# Altium PCB PCB1.pcbdoc (part 1 of 2)
Units mil, origin at the board's own origin, x right, y up, seen from the top; angles counter-clockwise.
Board outline 3910 x 3132 mil, 4 copper layers (Top Layer, Inner1, Inner2, Bottom Layer); 109 components, 89 nets, 472 pads, 360 vias.
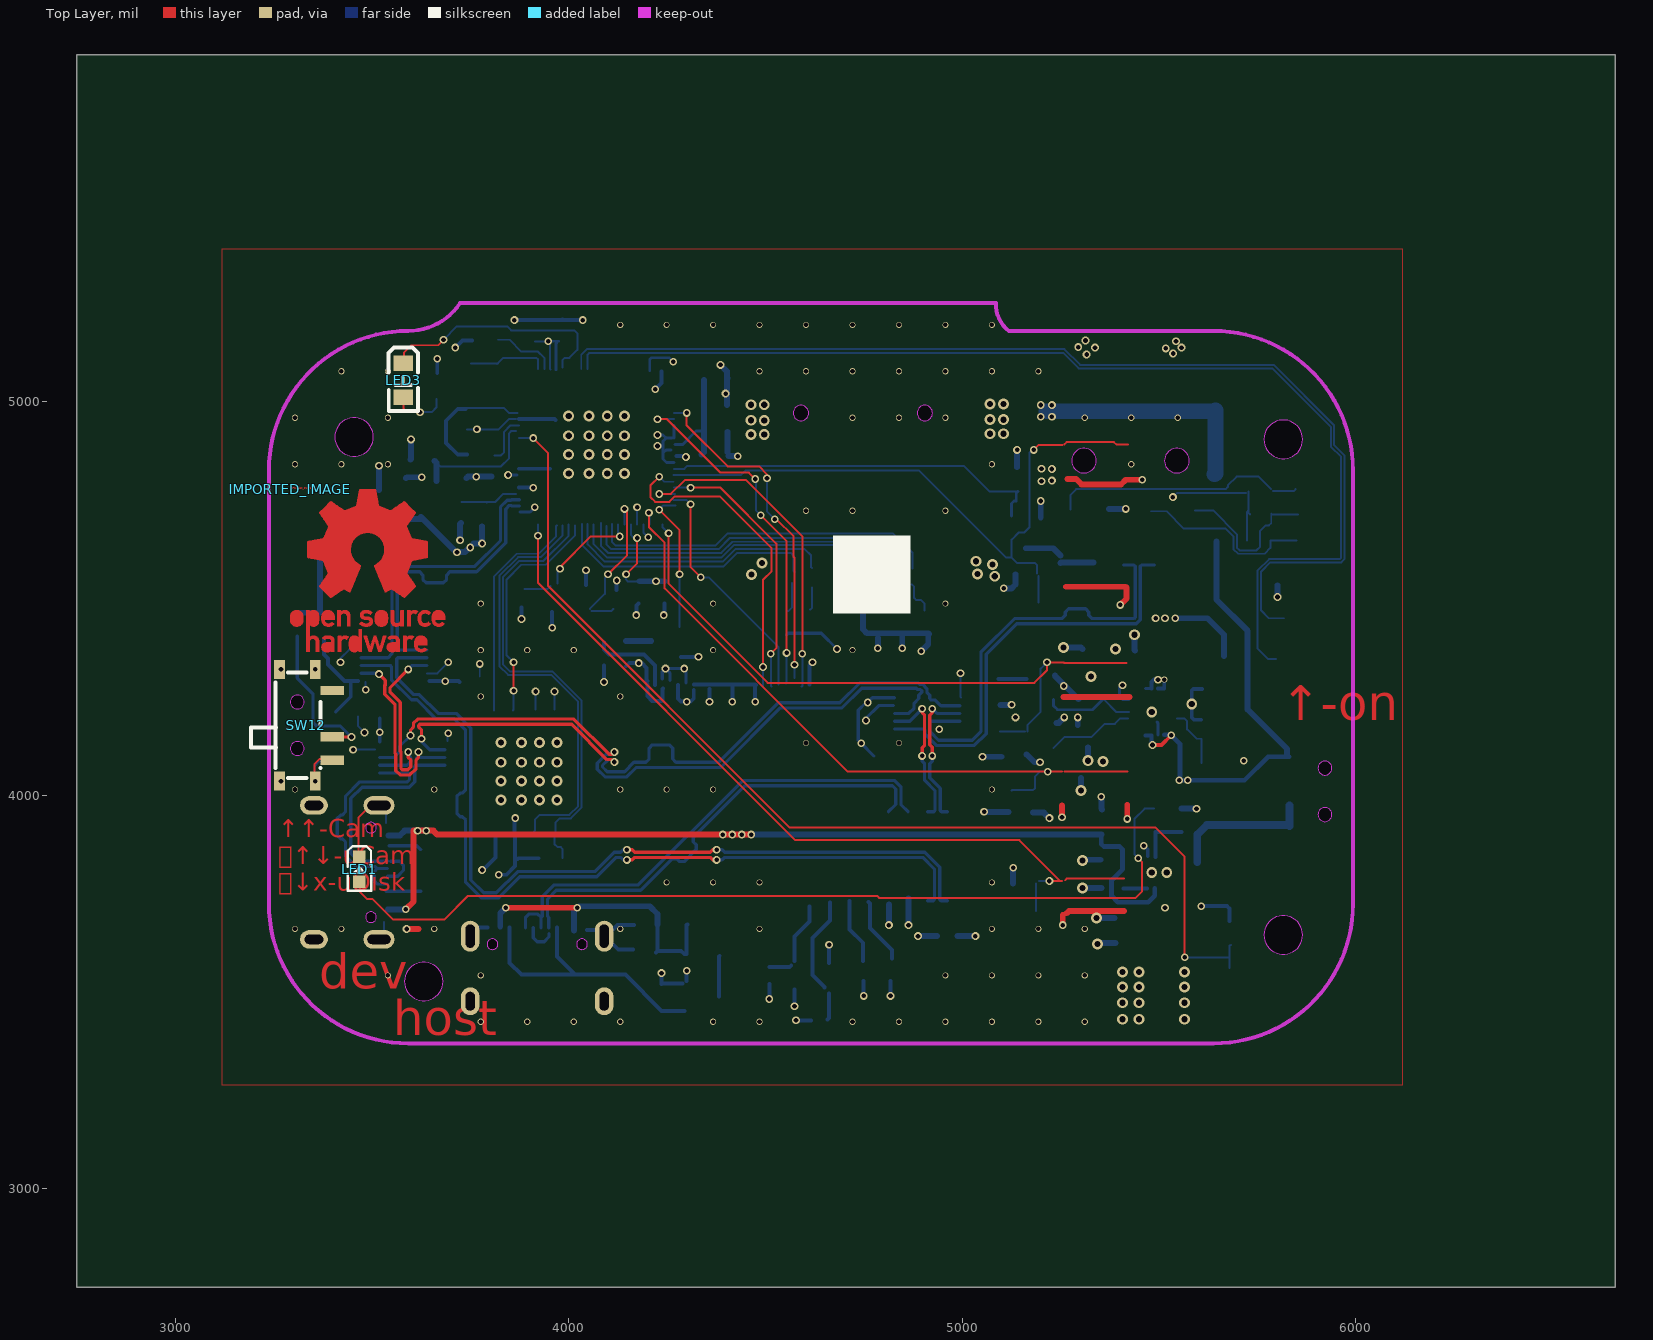
[diagram p0: Top Layer view]
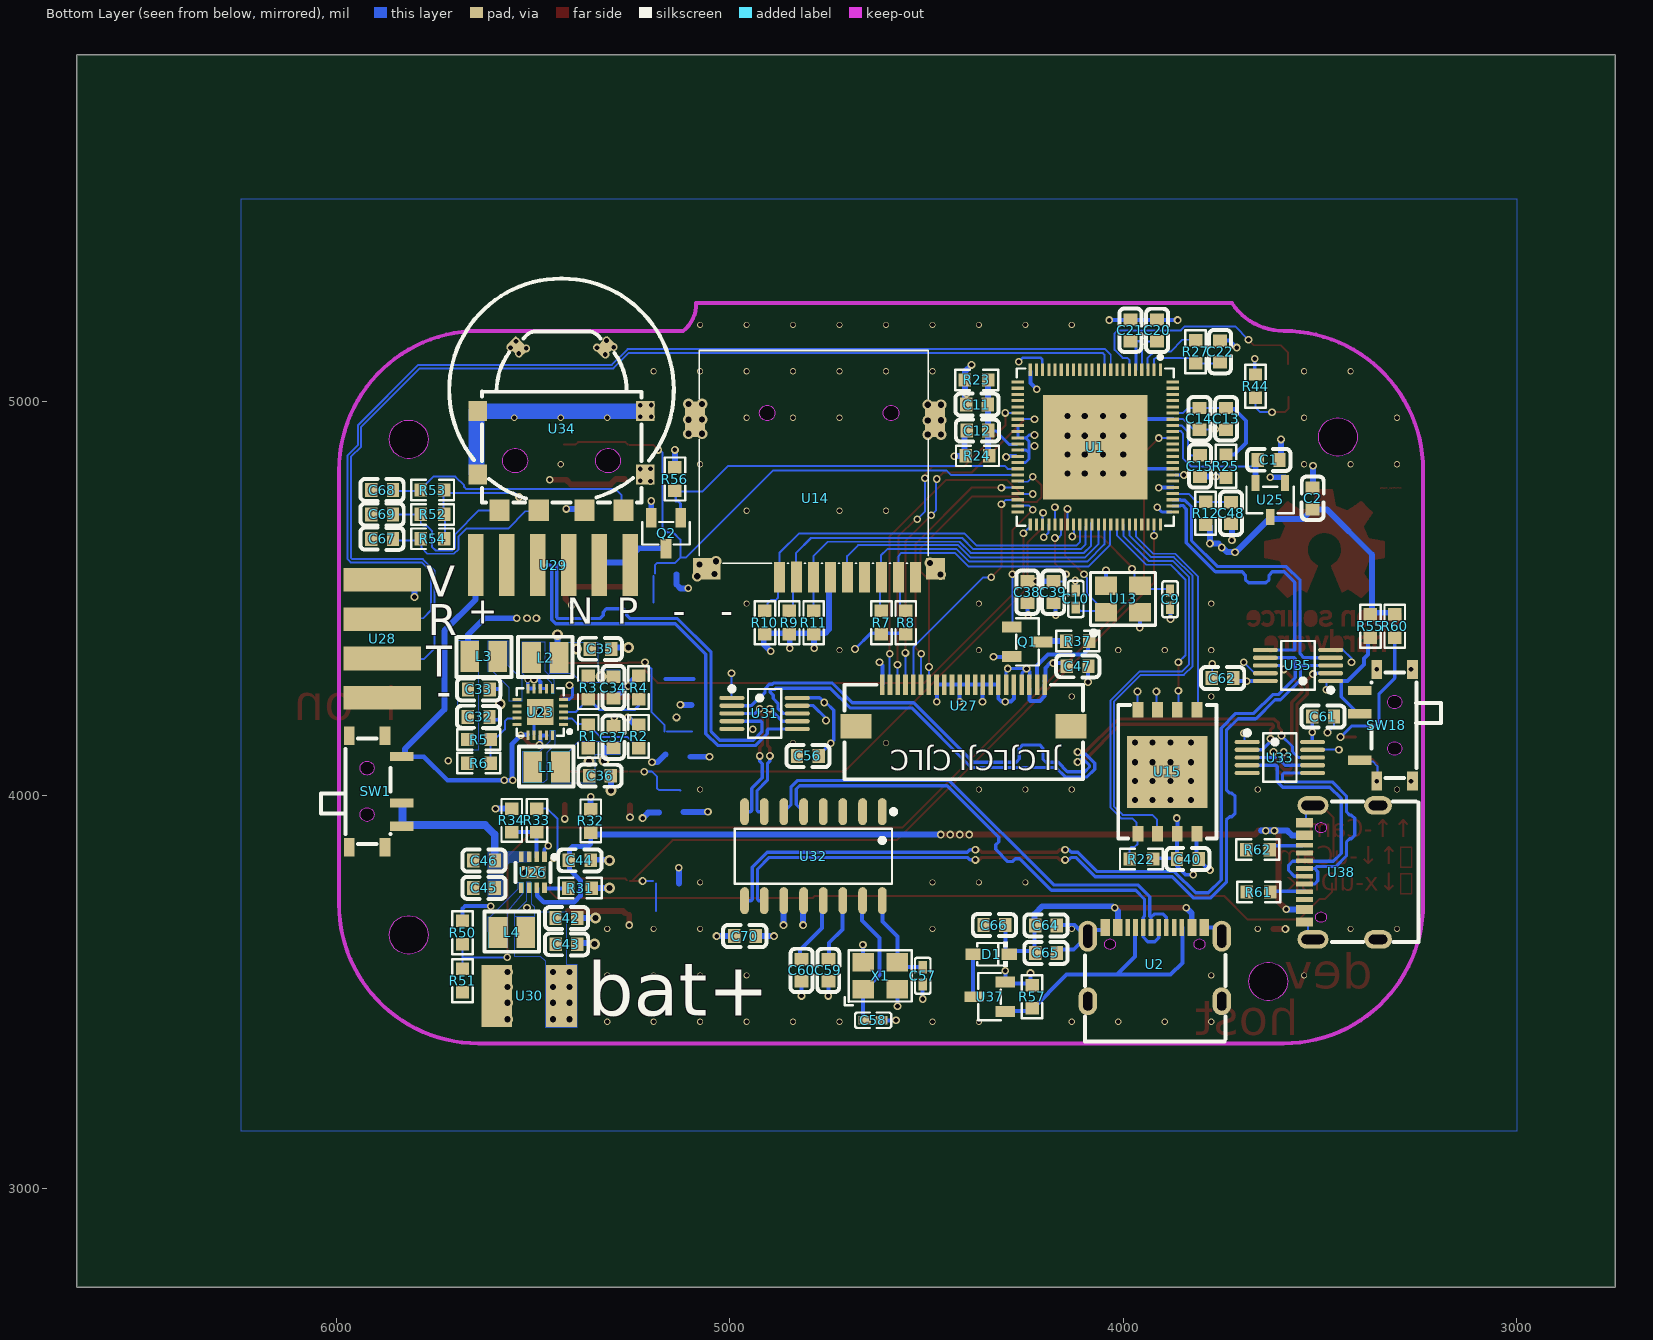
[diagram p1: Bottom Layer view, seen from below]
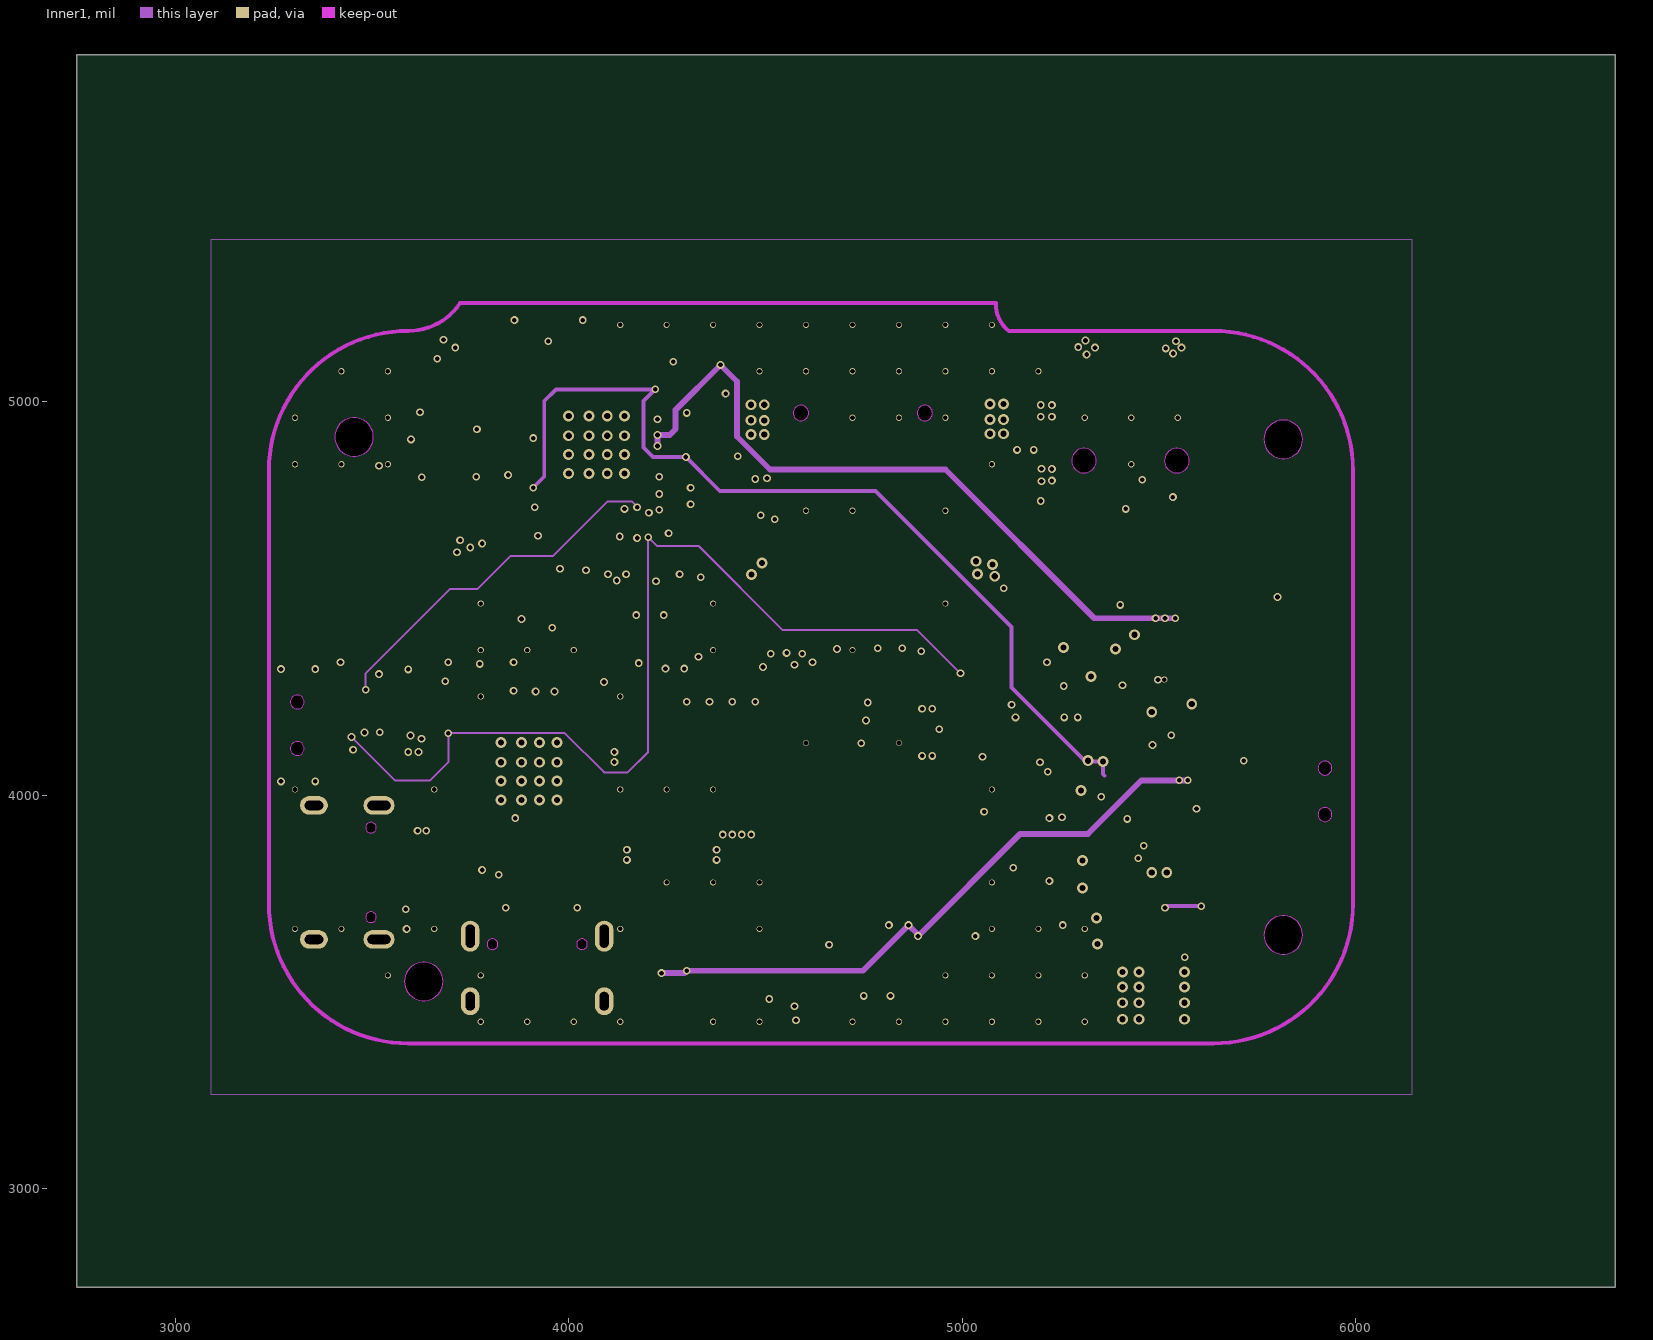
[diagram p2: Inner1]
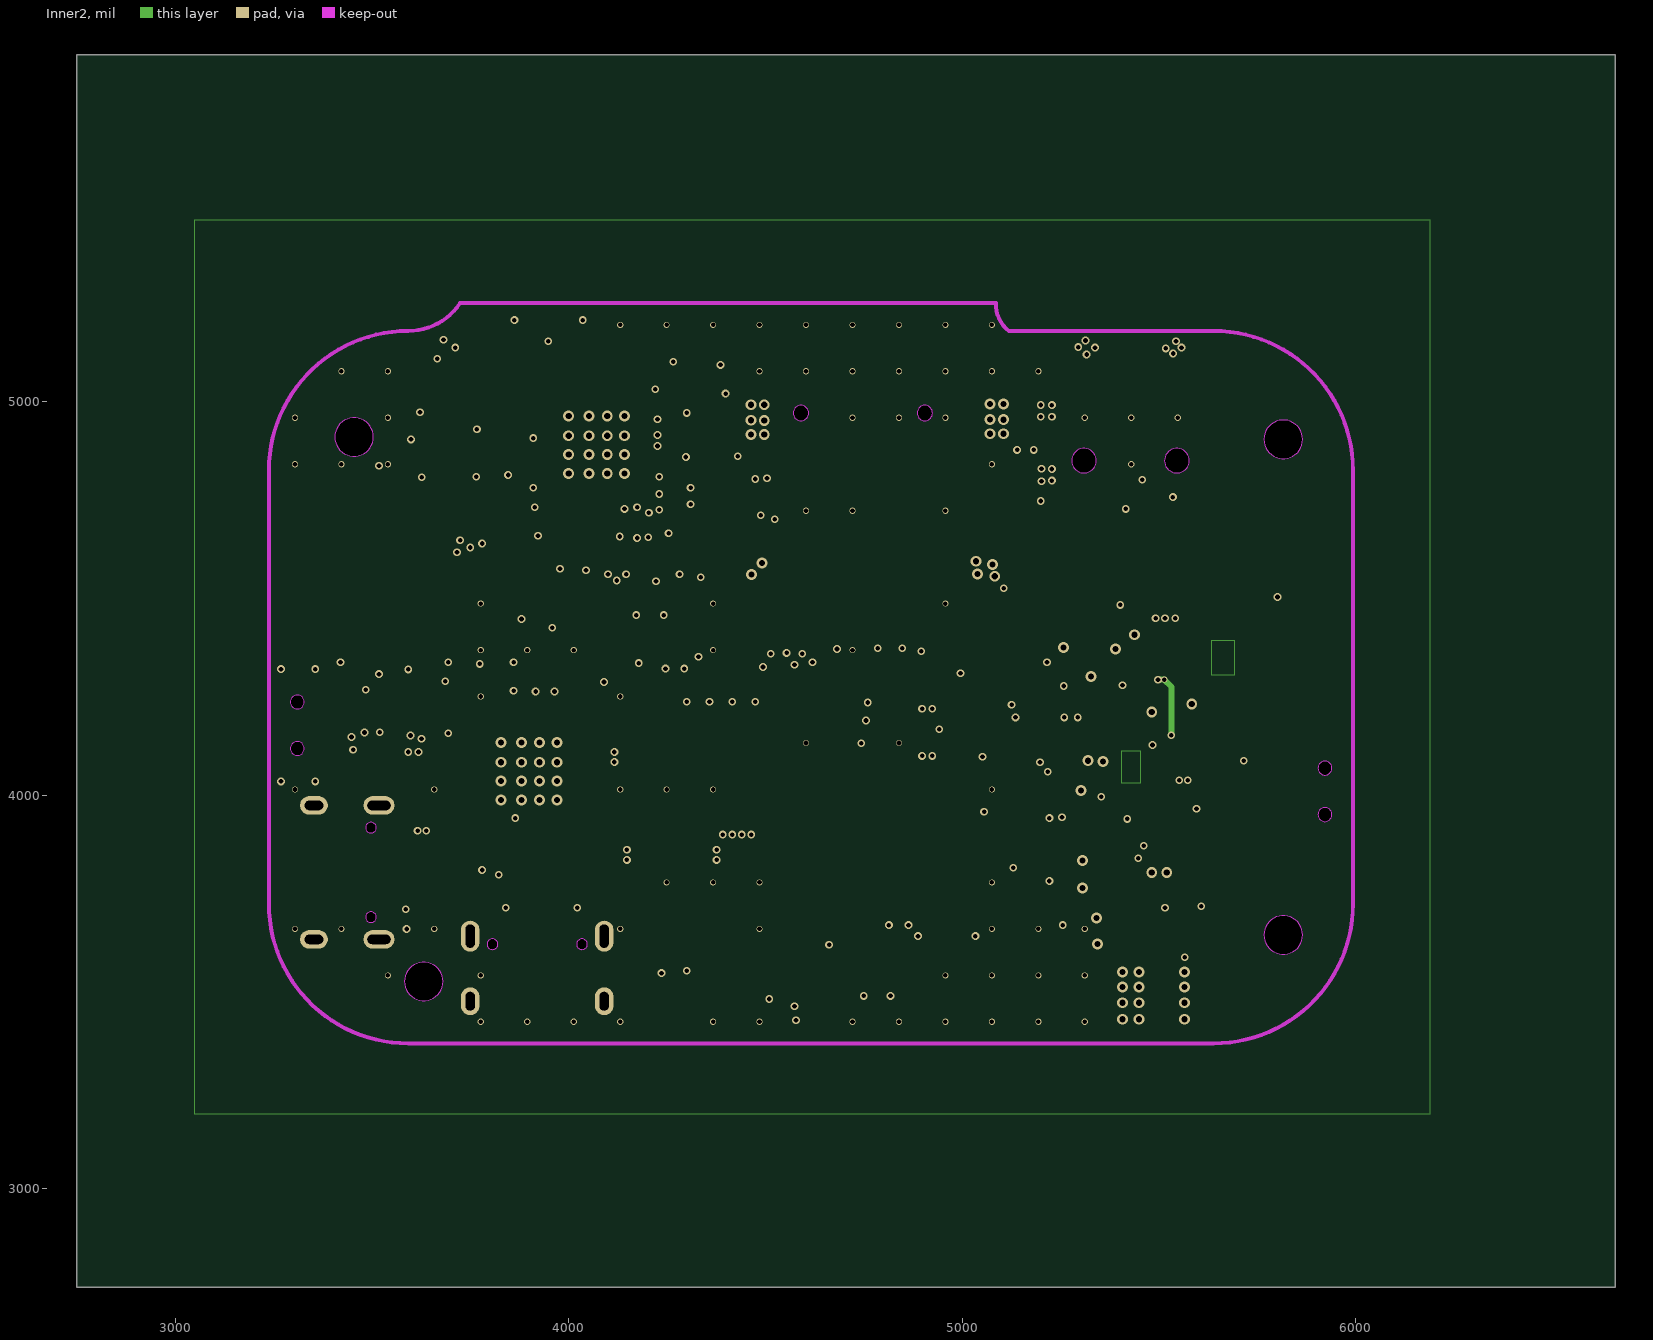
[diagram p3: Inner2]

## Layer stack, top to bottom
Top Layer: signal copper (thickness not stored)
Dielectric: dielectric 12.6, FR-4, Dk 4.8
Inner1: signal copper (thickness not stored)
Dielectric: dielectric 12.6, FR-4, Dk 4.8
Inner2: signal copper (thickness not stored)
Dielectric: dielectric 12.6, FR-4, Dk 4.8
Bottom Layer: signal copper (thickness not stored)

## Board outline
6660,2750 2750,2750 2750,5882 6660,5882
cut-out: 3503.69,4910.79 ccw(c3454.47,4910.62) 3405.26,4910.79 ccw(c3454.47,4910.96)
cut-out: 5865.88,4904.79 ccw(c5816.66,4904.79) 5767.45,4904.79 ccw(c5816.66,4904.79)
cut-out: 3680.84,3526.84 ccw(c3631.63,3526.54) 3582.42,3526.84 ccw(c3631.63,3527.14)
cut-out: 5865.88,3644.95 ccw(c5816.66,3644.95) 5767.45,3644.95 ccw(c5816.66,3644.95)

## Components (designator, comment, footprint, x,y, rotation, side; value= is the part's Value field where it differs from the comment)
C1 "CL10A105KB8NNNC" C0603 3630.66,4852.85 r0 bottom
C2 "CL10A105KB8NNNC" C0603 3518.66,4754.85 r270 bottom
C9 "0402CG180J500NT" C0402 3881.26,4498.43 r270 bottom
C10 "0402CG180J500NT" C0402 4120.72,4498.97 r270 bottom
C11 "0603B104K500NT" C0603 4372.12,4993.13 r0 bottom
C12 "0603B104K500NT" C0603 4370.72,4926.97 r180 bottom
C13 "CL10A106MA8NRNC" C0603 3738.72,4956.97 r270 bottom
C14 "0603B104K500NT" C0603 3806.72,4956.97 r270 bottom
C15 "CL10A105KB8NNNC" C0603 3805.16,4836.64 r270 bottom
C20 "CL10A106MA8NRNC" C0603 3914,5182 r90 bottom
C21 "0603B104K500NT" C0603 3982,5182 r270 bottom
C22 "CL10A105KB8NNNC" C0603 3754,5128 r90 bottom
C32 "CL10A106MA8NRNC" C0603 5638.89,4199.35 r180 bottom
C33 "0603B104K500NT" C0603 5638.45,4268.91 r180 bottom
C34 "CL10A106MA8NRNC" C0603 5296.3,4273.71 r270 bottom
C35 "0603B104K500NT" C0603 5329.1,4372.3 r180 bottom
C36 "CL10A106MA8NRNC" C0603 5330.3,4049.71 r180 bottom
C37 "0603B104K500NT" C0603 5296.3,4147.71 r90 bottom
C38 "CL10A225KO8NNNC" C0603 4243.92,4516.38 r90 bottom
C39 "0603B104K500NT" C0603 4177.92,4516.38 r90 bottom
C40 "CL10A225KO8NNNC" C0603 3836,3837.95 r180 bottom
C42 "CL10A106MA8NRNC" C0603 5415.87,3687.9 r0 bottom
C43 "CL10A106MA8NRNC" C0603 5415.53,3621.3 r0 bottom
C44 "CL10A106MA8NRNC" C0603 5381.8,3834.81 r0 bottom
C45 "CL10A106MA8NRNC" C0603 5624.99,3764.61 r180 bottom
C46 "CL10A106MA8NRNC" C0603 5624.8,3834.01 r180 bottom
C47 "CL10A106MA8NRNC" C0603 4116,4328 r0 bottom
C48 "CL10A106MA8NRNC" C0603 3726.02,4717.36 r90 bottom
C56 "0603B104K500NT" C0603 4802,4100 r0 bottom
C57 "0402CG180J500NT" C0402 4509.89,3541.16 r90 bottom
C58 "0402CG180J500NT" C0402 4636.11,3428.11 r0 bottom
C59 "CL10A106MA8NRNC" C0603 4749.89,3555.16 r90 bottom
C60 "CL10A106MA8NRNC" C0603 4817.89,3555.16 r90 bottom
C61 "0603B104K500NT" C0603 3492,4200 r180 bottom
C62 "0603B104K500NT" C0603 3748,4298 r0 bottom
C64 "CL10A106MA8NRNC" C0603 4196.59,3669.2 r180 bottom
C65 "CL10A106MA8NRNC" C0603 4196.59,3599.2 r180 bottom
C66 "CL10A106MA8NRNC" C0603 4328,3670 r0 bottom
C67 "0603B104K500NT" C0603 5884,4652 r180 bottom
C68 "0603B104K500NT" C0603 5884,4776 r180 bottom
C69 "0603B104K500NT" C0603 5884,4714 r180 bottom
C70 "0603B104K500NT" C0603 4962,3642 r180 bottom
D1 "1N5819WS_C191023" SOD-323_L1.8-W1.3-LS2.5-RD 4336,3596 r0 bottom
IMPORTED_IMAGE "IMPORTED_IMAGE" IMPORTED_IMAGE 3292,4778 r0 top
L1 "CMLW252012S2R2MST" IND-SMD_L2.5-W2.0_SWPA2520 5466.3,4071.71 r180 bottom
L2 "CMLW252012S2R2MST" IND-SMD_L2.5-W2.0_SWPA2520 5469.12,4350.17 r180 bottom
L3 "CMLW252012S2R2MST" IND-SMD_L2.5-W2.0_SWPA2520 5625.88,4353.24 r0 bottom
L4 "CMLW252012S2R2MST" IND-SMD_L2.5-W2.0_SWPA2520 5554.24,3651.45 r180 bottom
LED1 "XL-1608SURC-06" LED0603-RD_RED 3468,3812 r270 top
LED3 "XL-2012UGC" LED0805-RD_GREEN 3579.61,5055.27 r270 top
Q1 "SI2302" SOT-23-3_L2.9-W1.3-P1.90-LS2.4-BR 4244,4390 r0 bottom
Q2 "SI2302" SOT-23-3_L2.9-W1.3-P1.90-LS2.4-BR 5162.48,4666.14 r90 bottom
R1 "RC0603FR-07100KL" R0603 5360.3,4149.71 r270 bottom
R2 "RC0603FR-07100KL" R0603 5232.3,4149.71 r270 bottom
R3 "0603WAF4702T5E" R0603 5360.3,4273.71 r90 bottom
R4 "0603WAF1002T5E" R0603 5232.3,4273.71 r270 bottom
R5 "0603WAF1502T5E" R0603 5638.3,4141.71 r0 bottom
R6 "0603WAF4701T5E" R0603 5638.3,4081.71 r180 bottom
R7 "0603WAF1002T5E" R0603 4615.13,4438.87 r270 bottom
R8 "0603WAF1002T5E" R0603 4553.13,4438.87 r270 bottom
R9 "0603WAF1002T5E" R0603 4849.13,4438.87 r270 bottom
R10 "0603WAF1002T5E" R0603 4911.13,4438.87 r270 bottom
R11 "0603WAF1002T5E" R0603 4787.13,4438.87 r270 bottom
R12 "0603WAF1002T5E" R0603 3790.72,4716.97 r270 bottom
R22 "0603WAF1002T5E" R0603 3954,3837.95 r180 bottom
R23 "0603WAF2001T5E" R0603 4372.9,5055.74 r180 bottom
R24 "0603WAF2001T5E" R0603 4370.72,4862.97 r0 bottom
R25 "0603WAF1002T5E" R0603 3739.16,4836.64 r90 bottom
R27 "0603WAF220JT5E" R0603 3816.38,5127.31 r270 bottom
R31 "0603WAF1001T5E" R0603 5380.8,3764.01 r180 bottom
R32 "0603WAF1001T5E" R0603 5353.8,3934.81 r270 bottom
R33 "0603WAF3001T5E" R0603 5490.8,3936.01 r90 bottom
R34 "0603WAF1002T5E" R0603 5554.8,3936.01 r270 bottom
R37 "0603WAF100JT5E" R0603 4116,4392 r180 bottom
R44 "0603WAF3001T5E" R0603 3664,5040 r90 bottom
R50 "0603WAF1002T5E" R0603 5679.8,3650.81 r90 bottom
R51 "0603WAF1002T5E" R0603 5679.8,3528.81 r90 bottom
R52 "0603WAF1002T5E" R0603 5756,4714 r180 bottom
R53 "0603WAF1002T5E" R0603 5756,4776 r180 bottom
R54 "0603WAF1002T5E" R0603 5756,4652 r180 bottom
R55 "0603WAF1002T5E" R0603 3372,4430 r270 bottom
R56 "0603WAF2001T5E" R0603 5140,4804 r90 bottom
R57 "0603WAF1002T5E" R0603 4232,3488 r270 bottom
R60 "0603WAF1002T5E" R0603 3310,4430 r270 bottom
R61 "0603WAF5101T5E" R0603 3656,3754 r180 bottom
R62 "0603WAF5101T5E" R0603 3658,3862 r180 bottom
SW1 "MSK12C02" SW-TH_MSK12C02 5900.77,4009.95 r270 bottom
SW12 "MSK12C02" SW-TH_MSK12C02 3332,4178 r270 top
SW18 "MSK12C02" SW-TH_MSK12C02 3332,4178 r90 bottom
U1 "F1C200S" QFN-88_L10.0-W10.0-P0.40-BL-EP6.75 4071.32,4885.09 r0 bottom
U2 "TypeC-16PIN" USB-C-SMD_TYPE-C-6PIN-2MD-073#1 3920,3570 r180 bottom
U13 "24m" CRYSTAL-SMD_4P-L3.2-W2.5-BL_SIT8008BI 4000.72,4498.97 r180 bottom
U14 "TF-015-N" TF-SMD_TF-015 4783.13,4754.87 r0 bottom
U15 "W25Q256JWEIQ_C2940048" WSON-8_L8.0-W6.0-P1.27-TL-EP 3888,4059.77 r90 bottom
U23 "EA3036" QFN-20_L3.0-W3.0-P0.40-TL-EP1.7 5482.3,4211.71 r0 bottom
U25 "XC6206P302MR_C347375" SOT-23-3_L3.0-W1.7-P0.95-LS2.9-BR 3626.66,4750.85 r90 bottom
U26 "LGS5500DA" DFN-8_L2.0-W2.0-P0.50-TL-EP 5500.8,3804.01 r270 bottom
U27 "2.0寸ips" 2.0寸ips 3724,3366 r0 top
U28 "UART2.54" uart2.54 5883.59,4247.59 r90 bottom
U29 "ir" ir 5252.92,4585.38 r0 bottom
U30 "bat" bat 5592.8,3490.01 r180 bottom
U31 "MSUSB30" MSOP-10_L3.0-W3.0-P0.50-LS5.0-BL 4912,4208 r270 bottom
U32 "SL2.1A" SOP-16_L10.0-W3.9-P1.27-LS6.0-BL 4787.89,3845.16 r0 bottom
U33 "MSUSB30" MSOP-10_L3.0-W3.0-P0.50-LS5.0-BL 3602,4096 r270 bottom
U34 "SIQ-02FVS3" SW-SMD_SIQ-02FVS3_1 5428,4932 r180 bottom
U35 "MSUSB30" MSOP-10_L3.0-W3.0-P0.50-LS5.0-BL 3556,4330 r90 bottom
U37 "SI2301-ZE" SOT-23-3_L2.9-W1.3-P1.90-LS2.4-BR 4340,3488 r180 bottom
U38 "TypeC-16PIN" USB-C-SMD_TYPE-C-6PIN-2MD-073#2 3446,3804 r90 bottom
X1 "X322512MSB4SI" OSC-SMD_4P-L3.2-W2.5-BL 4617.89,3541.16 r180 bottom

## Footprints (in the part's own frame and the unit in brackets; to place one, negate y for a bottom-side part, rotate by r counter-clockwise, add the part's x,y. Pads: shape width x height; smd on the part's side, far side on the other; paste and mask are expansions set on the pad)
2.0寸ips [mm]
  rect 0.3x1.3 smd far side: 1(12.076,23.238) 2(12.576,23.238) 3(13.076,23.238) 4(13.576,23.238) 5(14.076,23.238) 6(14.576,23.238) 7(15.076,23.238) 8(15.576,23.238) 9(16.078,23.239) 10(16.576,23.238) 11(17.076,23.238) 12(17.576,23.238) 13(18.076,23.238) 14(18.576,23.238) 15(19.076,23.238) 16(19.576,23.238) 17(20.076,23.238) 18(20.576,23.238) 19(21.076,23.238) 20(21.578,23.239) 21(22.076,23.238) 22(22.576,23.238)
  rect 2x1.6 smd far side: 23(24.278,20.561) 24(10.378,20.561)
bat [mm]
  rect 2x4 smd: 1(0,0) 2(4.191,0)
C0402 [mm]
  rect 0.79x0.54 smd: 1(-0.545,0) 2(0.545,0)
  silkscreen extent -1.17,-0.5 1.17,0.5
C0603 [mm]
  rect 0.8x0.9 smd: 1(-0.7,0) 2(0.7,0)
  silkscreen extent -1.41,-0.71 1.39,0.72
CRYSTAL-SMD_4P-L3.2-W2.5-BL_SIT8008BI [mm]
  rect 1.4x1.2 smd: 1(-1.1,-0.85) 2(1.1,-0.85) 3(1.1,0.85) 4(-1.1,0.85)
  silkscreen extent -2.1,-2.35 2.1,1.7
DFN-8_L2.0-W2.0-P0.50-TL-EP [mm]
  rect 0.67x0.3 smd: 1(-1,0.75) 2(-1,0.25) 3(-1,-0.25) 4(-1,-0.75) 5(1,-0.75) 6(1,-0.25) 7(1,0.25) 8(1,0.75)
  rect 0.8x1.6 smd: 9(0,0)
  silkscreen extent -1.12,-1.13 0.62,1.5
IMPORTED_IMAGE [mil]
  Top Layer region: 77 vertices and 1 holes, not listed, extent 149.46,-414.45 182.14,-356
  Top Layer region: 121 vertices and 1 holes, not listed, extent 79.37,-414.45 112.46,-372.17
  Top Layer region: 123 vertices and 1 holes, not listed, extent 315.36,-414.45 349.1,-372.17
  Top Layer region: 119 vertices and 1 holes, not listed, extent 245.27,-414.45 278.37,-372.17
  Top Layer region: 141 vertices and 1 holes, not listed, extent 40.75,-413.69 73.64,-307.4
  Top Layer region: 295.46,-413.49 295.09,-413.69 291.39,-413.64 287.68,-413.58 287.68,-393.21 287.68,-372.83 291.46,-372.78 295.24,-372.73 295.55,-373.03 295.85,-373.34 295.85,-374.76 295.85,-376.17 296.05,-376.29 296.25,-376.42 297.36,-375.45 298.48,-374.48 299.81,-373.78 301.13,-373.07 302.1,-372.8 303.06,-372.52 303.64,-372.35 304.21,-372.18 306.62,-372.23 309.02,-372.27 310.08,-372.62 311.14,-372.98 312,-373.38 312.87,-373.79 313.67,-374.27 314.47,-374.75 314.66,-375.16 314.85,-375.56 314.71,-375.78 314.57,-376.01 313.81,-376.9 313.06,-377.8 311.81,-379.25 310.55,-380.71 310,-381.43 309.46,-382.15 309.01,-382.15 308.56,-382.15 308.44,-381.96 308.32,-381.76 307.13,-381.15 305.94,-380.54 303.73,-380.54 301.52,-380.55 300.37,-381.09 299.22,-381.64 298.14,-382.71 297.06,-383.79 296.51,-384.94 295.95,-386.1 295.89,-399.69 295.84,-413.29
  Top Layer region: 129.51,-413.69 125.55,-413.64 121.59,-413.58 121.54,-393.59 121.48,-373.6 121.59,-373.17 121.69,-372.73 125.62,-372.73 129.55,-372.73 129.75,-373.11 129.95,-373.48 129.95,-374.92 129.95,-376.36 130.13,-376.48 130.32,-376.59 131.37,-375.58 132.42,-374.56 133.79,-373.82 135.17,-373.08 136.17,-372.79 137.16,-372.51 137.74,-372.35 138.31,-372.18 140.72,-372.23 143.12,-372.28 144.37,-372.71 145.62,-373.15 146.61,-373.61 147.61,-374.08 148.3,-374.73 148.98,-375.38 148.98,-375.55 148.98,-375.73 148.35,-376.39 147.72,-377.06 146.38,-378.69 145.04,-380.31 144.59,-380.8 144.13,-381.29 143.84,-381.72 143.56,-382.15 143.11,-382.15 142.66,-382.15 142.54,-381.96 142.42,-381.77 141.23,-381.16 140.04,-380.56 137.83,-380.56 135.62,-380.55 134.35,-381.15 133.08,-381.75 132.22,-382.59 131.36,-383.42 130.7,-384.76 130.05,-386.1 130,-399.63 129.94,-413.17 129.73,-413.43
  Top Layer region: 277 vertices and 0 holes, not listed, extent 186.82,-413.68 244.54,-372.73
  Top Layer region: 87 vertices and 1 holes, not listed, extent 0,-349.3 33.87,-307.41
  Top Layer region: 109 vertices and 1 holes, not listed, extent 359.83,-349.16 393.7,-307.4
  Top Layer region: 274.03,-348.62 272.5,-349.15 269.8,-349.15 267.11,-349.14 265.61,-348.63 264.11,-348.13 263.31,-347.72 262.51,-347.31 261.93,-346.9 261.35,-346.5 259.99,-345.15 258.63,-343.8 258.26,-343.23 257.89,-342.65 257.45,-341.79 257.01,-340.92 256.49,-339.48 255.98,-338.04 255.91,-323.43 255.84,-308.82 256.04,-308.29 256.24,-307.76 260,-307.76 263.76,-307.76 263.95,-308.25 264.13,-308.75 264.13,-320.65 264.13,-332.54 264.35,-334.04 264.57,-335.54 265.03,-336.53 265.49,-337.53 266.5,-338.58 267.5,-339.64 268.46,-340.12 269.42,-340.61 270.96,-340.84 272.5,-341.06 274.11,-340.76 275.72,-340.45 276.05,-340.16 276.37,-339.86 276.57,-339.86 276.76,-339.86 277.71,-338.95 278.66,-338.04 279.2,-337.08 279.73,-336.12 280.1,-334.38 280.47,-332.65 280.47,-320.58 280.47,-308.5 280.67,-308.13 280.87,-307.76 284.48,-307.76 288.09,-307.76 288.32,-307.99 288.55,-308.22 288.55,-328.19 288.55,-348.15 288.35,-348.53 288.15,-348.9 284.51,-348.9 280.87,-348.9 280.67,-348.53 280.47,-348.15 280.47,-346.51 280.47,-344.86 280.41,-344.86 280.34,-344.86 279.73,-345.16 279.13,-345.47 279.13,-345.6 279.13,-345.74 278.21,-346.44 277.3,-347.13 276.44,-347.61 275.57,-348.09
  Top Layer region: 83 vertices and 1 holes, not listed, extent 215.22,-349.15 248.8,-307.4
  Top Layer region: 347.46,-348.73 346.31,-349.14 342.85,-349.14 339.39,-349.13 338.17,-348.72 336.94,-348.32 336.66,-348.32 336.38,-348.32 334.72,-347.49 333.05,-346.66 331.99,-345.92 330.94,-345.18 329.8,-344.01 328.67,-342.84 328.17,-342.07 327.68,-341.31 327.44,-340.92 327.21,-340.54 326.62,-339.31 326.03,-338.08 326.03,-337.87 326.02,-337.65 325.65,-336.88 325.28,-336.12 325.27,-335.62 325.26,-335.13 324.93,-334.08 324.6,-333.04 324.59,-328.52 324.59,-324 324.95,-322.47 325.3,-320.93 325.46,-320.35 325.62,-319.78 325.93,-318.91 326.24,-318.05 327.03,-316.49 327.82,-314.93 328.94,-313.57 330.06,-312.21 331.38,-311.14 332.71,-310.07 334.45,-309.2 336.19,-308.34 336.5,-308.34 336.81,-308.34 337.53,-308.03 338.24,-307.73 339.49,-307.56 340.74,-307.4 343.72,-307.47 346.7,-307.54 348.04,-307.96 349.39,-308.39 350.83,-309.08 352.27,-309.78 353.58,-310.66 354.89,-311.53 356.21,-312.83 357.54,-314.12 357.41,-314.48 357.27,-314.83 355.25,-316.64 353.24,-318.44 352.57,-319.06 351.9,-319.68 351.78,-319.68 351.66,-319.68 351.01,-319.05 350.35,-318.42 349.49,-317.74 348.62,-317.06 347.56,-316.55 346.51,-316.05 345.07,-315.74 343.63,-315.43 342.67,-315.55 341.7,-315.67 340.29,-315.95 338.88,-316.23 337.89,-316.73 336.9,-317.23 335.83,-318.32 334.77,-319.41 334.25,-320.46 333.74,-321.51 333.3,-322.95 332.87,-324.39 332.86,-328.33 332.86,-332.27 333.3,-333.71 333.75,-335.15 334.24,-336.12 334.74,-337.08 335.39,-337.88 336.04,-338.69 336.85,-339.23 337.66,-339.78 338.62,-340.19 339.59,-340.6 341.58,-340.83 343.57,-341.06 345.04,-340.82 346.51,-340.57 347.56,-340.04 348.62,-339.5 349.14,-339.15 349.66,-338.79 350.62,-337.89 351.57,-336.98 351.74,-336.98 351.91,-336.98 354.02,-338.85 356.13,-340.73 356.75,-341.24 357.37,-341.76 357.37,-342.23 357.37,-342.69 356.16,-343.82 354.96,-344.96 354.48,-345.29 354,-345.62 353.24,-346.15 352.47,-346.69 351.99,-346.93 351.5,-347.17 351.22,-347.34 350.93,-347.51 350.04,-347.91 349.16,-348.32 348.88,-348.32 348.61,-348.32
  Top Layer region: 117 vertices and 1 holes, not listed, extent 79.16,-349.14 113.04,-307.4
  Top Layer region: 173 vertices and 0 holes, not listed, extent 175.51,-349.14 210.28,-307.4
  Top Layer region: 128.22,-348.53 128.02,-348.9 124.3,-348.9 120.58,-348.9 120.36,-348.64 120.15,-348.38 120.2,-328.12 120.24,-307.86 124.21,-307.81 128.18,-307.75 128.29,-308.19 128.41,-308.63 128.41,-309.97 128.42,-311.32 128.6,-311.61 128.79,-311.89 129.32,-311.29 129.86,-310.69 130.72,-310.03 131.59,-309.36 132.49,-308.85 133.38,-308.34 133.64,-308.34 133.89,-308.34 134.47,-308.04 135.04,-307.74 136.1,-307.57 137.16,-307.4 139.66,-307.48 142.16,-307.56 143.54,-308.05 144.92,-308.53 146.27,-309.31 147.62,-310.09 149.06,-311.63 150.51,-313.16 150.8,-313.68 151.08,-314.2 151.39,-314.87 151.69,-315.55 151.88,-315.93 152.06,-316.32 152.49,-317.85 152.91,-319.39 152.98,-333.63 153.04,-347.86 152.84,-348.38 152.65,-348.9 148.79,-348.9 144.94,-348.9 144.75,-348.41 144.56,-347.91 144.56,-335.14 144.56,-322.36 144.1,-321.05 143.65,-319.75 143.16,-318.99 142.68,-318.24 142.02,-317.61 141.37,-316.98 140.61,-316.58 139.85,-316.18 139.18,-316.01 138.51,-315.83 137.55,-315.64 136.58,-315.44 134.95,-315.76 133.32,-316.08 132.45,-316.58 131.59,-317.08 130.91,-317.76 130.24,-318.43 129.81,-319.05 129.38,-319.66 128.9,-321.14 128.41,-322.61 128.41,-335.38 128.41,-348.15
  Top Layer region: 297.96,-348.9 297.77,-348.41 297.58,-347.91 297.58,-328.33 297.58,-308.75 297.77,-308.25 297.96,-307.76 301.88,-307.76 305.8,-307.76 305.92,-308.19 306.04,-308.63 306.04,-310.01 306.04,-311.39 306.25,-311.52 306.46,-311.65 307.07,-311.09 307.67,-310.53 308.54,-309.87 309.41,-309.2 310.27,-308.79 311.14,-308.37 311.93,-308.05 312.72,-307.73 313.75,-307.56 314.79,-307.4 317.33,-307.47 319.87,-307.55 320.88,-307.96 321.9,-308.36 322.67,-308.76 323.44,-309.16 324.25,-309.66 325.06,-310.16 325.07,-310.47 325.07,-310.78 324.65,-311.34 324.22,-311.89 324.11,-311.99 323.99,-312.09 322.98,-313.32 321.96,-314.55 321.73,-314.78 321.5,-315.02 320.55,-316.19 319.59,-317.37 319.44,-317.37 319.28,-317.37 318.38,-316.87 317.48,-316.37 317.29,-316.23 317.09,-316.09 315.59,-315.74 314.08,-315.4 312.42,-315.74 310.75,-316.08 309.98,-316.53 309.21,-316.97 308.56,-317.6 307.91,-318.24 307.45,-318.84 307,-319.43 306.52,-320.8 306.04,-322.17 306.04,-335.04 306.04,-347.91 305.85,-348.41 305.67,-348.9 301.81,-348.9
  Top Layer region: 1147 vertices and 0 holes, not listed, extent 43.83,-275.85 349.87,0
IND-SMD_L2.5-W2.0_SWPA2520 [mm]
  rect 1.2x2 smd: 1(-0.9,0) 2(0.9,0)
  silkscreen extent -1.78,-1.25 1.75,1.34
ir [mm]
  rect 1x4 smd: 1(0,0) 2(2,0) 3(4,0) 4(6,0) 5(8,0) 6(10,0)
LED0603-RD_RED [mm]
  rect 0.8x0.8 smd: 1(-0.8,-0.003) 2(0.8,0.003)
  silkscreen extent -1.49,-0.75 1.39,0.76
LED0805-RD_GREEN [mm]
  rect 1x1.25 smd: 1(-1.1,0) 2(1.1,0)
  silkscreen extent -2.1,-0.95 1.98,0.96
MSOP-10_L3.0-W3.0-P0.50-LS5.0-BL [mm]
  oval 0.28x1.62 smd: 1(-1,-2.11) 2(-0.5,-2.11) 3(0,-2.11) 4(0.5,-2.11) 5(1,-2.11) 6(1,2.11) 7(0.5,2.11) 8(0,2.11) 9(-0.5,2.11) 10(-1,2.11)
  silkscreen extent -1.74,-2.26 1.58,1.07
OSC-SMD_4P-L3.2-W2.5-BL [mm]
  rect 1.4x1.2 smd: 1(-1.1,-0.875) 2(1.1,-0.875) 3(1.1,0.875) 4(-1.1,0.875)
  silkscreen extent -2.29,-1.9 2.03,1.65
QFN-20_L3.0-W3.0-P0.40-TL-EP1.7 [mm]
  rect 0.6x0.2 smd: 1(-1.5,0.8) 2(-1.5,0.4) 3(-1.5,0) 4(-1.5,-0.4) 5(-1.5,-0.8) 11(1.5,-0.8) 12(1.5,-0.4) 13(1.5,0) 14(1.5,0.4) 15(1.5,0.8)
  rect 0.2x0.6 smd: 6(-0.8,-1.5) 7(-0.4,-1.5) 8(0,-1.5) 9(0.4,-1.5) 10(0.8,-1.5) 16(0.8,1.5) 17(0.4,1.5) 18(0,1.5) 19(-0.4,1.5) 20(-0.8,1.5)
  rect 1.7x1.7 smd: 21(0,0)
  silkscreen extent -2,-1.52 1.52,1.52
QFN-88_L10.0-W10.0-P0.40-BL-EP6.75 [mm]
  rect 0.2x0.8 smd: 1(-4.2,-5) 2(-3.8,-5) 3(-3.4,-5) 4(-3,-5) 5(-2.6,-5) 6(-2.2,-5) 7(-1.8,-5) 8(-1.4,-5) 9(-1,-5) 10(-0.6,-5) 11(-0.2,-5) 12(0.2,-5) 13(0.6,-5) 14(1,-5) 15(1.4,-5) 16(1.8,-5) 17(2.2,-5) 18(2.6,-5) 19(3,-5) 20(3.4,-5) 21(3.8,-5) 22(4.2,-5) 45(4.2,5) 46(3.8,5) 47(3.4,5) 48(3,5) 49(2.6,5) 50(2.2,5) 51(1.8,5) 52(1.4,5) 53(1,5) 54(0.6,5) 55(0.2,5) 56(-0.2,5) 57(-0.6,5) 58(-1,5) 59(-1.4,5) 60(-1.8,5) 61(-2.2,5) 62(-2.6,5) 63(-3,5) 64(-3.4,5) 65(-3.8,5) 66(-4.2,5)
  rect 0.8x0.2 smd: 23(5,-4.2) 24(5,-3.8) 25(5,-3.4) 26(5,-3) 27(5,-2.6) 28(5,-2.2) 29(5,-1.8) 30(5,-1.4) 31(5,-1) 32(5,-0.6) 33(5,-0.2) 34(5,0.2) 35(5,0.6) 36(5,1) 37(5,1.4) 38(5,1.8) 39(5,2.2) 40(5,2.6) 41(5,3) 42(5,3.4) 43(5,3.8) 44(5,4.2) 67(-5,4.2) 68(-5,3.8) 69(-5,3.4) 70(-5,3) 71(-5,2.6) 72(-5,2.2) 73(-5,1.8) 74(-5,1.4) 75(-5,1) 76(-5,0.6) 77(-5,0.2) 78(-5,-0.2) 79(-5,-0.6) 80(-5,-1) 81(-5,-1.4) 82(-5,-1.8) 83(-5,-2.2) 84(-5,-2.6) 85(-5,-3) 86(-5,-3.4) 87(-5,-3.8) 88(-5,-4.2)
  rect 6.75x6.75 smd: 89(0,0)
  silkscreen extent -5.08,-5.93 5.08,5.08
R0603 [mil]
  rect 31.75x34.02 smd: 1(-29.66,0) 2(29.66,0)
  silkscreen extent -55,-26 55,26
SOD-323_L1.8-W1.3-LS2.5-RD [mm]
  rect 1x0.75 smd: 1(-1.173,0) 2(1.173,0)
  silkscreen extent -1.08,-0.8 0.9,0.8
SOP-16_L10.0-W3.9-P1.27-LS6.0-BL [mm]
  oval 0.56x1.745 smd: 1(-4.445,-2.872) 2(-3.175,-2.872) 3(-1.905,-2.872) 4(-0.635,-2.872) 5(0.635,-2.872) 6(1.905,-2.872) 7(3.175,-2.872) 8(4.445,-2.872) 9(4.445,2.872) 10(3.175,2.872) 11(1.905,2.872) 12(0.635,2.872) 13(-0.635,2.872) 14(-1.905,2.872) 15(-3.175,2.872) 16(-4.445,2.872)
  silkscreen extent -5.33,-3.02 5.08,1.77
SOT-23-3_L2.9-W1.3-P1.90-LS2.4-BR [mm]
  rect 1.25x0.7 smd: 1(1,-0.95) 2(1,0.95) 3(-1,0)
  silkscreen extent -0.73,-1.53 0.73,1.53
SOT-23-3_L3.0-W1.7-P0.95-LS2.9-BR [mil]
  rect 40.85x20.95 smd: 1(43.36,-37.4) 2(43.36,37.4) 3(-43.36,0)
  silkscreen extent -34,-60 34,60
SW-SMD_SIQ-02FVS3_1 [mm]
  rect 1.2x1.3 smd: 1(5.4,-2.964) 2(5.4,1.136) 5(-5.4,1.136) 6(-5.4,-2.964)
  rect 0.85x1.2 smd rot 135: 3(2.828,5.264)
  rect 0.85x1.2 smd rot 45: 4(-2.828,5.264)
  rect 1.3x1.4 smd: A(-4,-5.264) B(4,-5.264) C(1.475,-5.264) S(-1.475,-5.264)
  Multi-Layer board cut-out: 2.2,-2.064 2.279,-1.717 2.501,-1.439 2.822,-1.284 3.178,-1.284 3.499,-1.439 3.721,-1.717 3.8,-2.064 3.8,-2.064 3.721,-2.411 3.499,-2.69 3.178,-2.844 2.822,-2.844 2.501,-2.69 2.279,-2.411 2.2,-2.064
  Multi-Layer board cut-out: -3.8,-2.064 -3.721,-1.717 -3.499,-1.439 -3.178,-1.284 -2.822,-1.284 -2.501,-1.439 -2.279,-1.717 -2.2,-2.064 -2.2,-2.064 -2.279,-2.411 -2.501,-2.69 -2.822,-2.844 -3.178,-2.844 -3.499,-2.69 -3.721,-2.411 -3.8,-2.064
  Multi-Layer keep-out region: 2.2,-2.064 2.279,-1.717 2.501,-1.439 2.822,-1.284 3.178,-1.284 3.499,-1.439 3.721,-1.717 3.8,-2.064 3.8,-2.064 3.721,-2.411 3.499,-2.69 3.178,-2.844 2.822,-2.844 2.501,-2.69 2.279,-2.411 2.2,-2.064
  Multi-Layer keep-out region: -3.8,-2.064 -3.721,-1.717 -3.499,-1.439 -3.178,-1.284 -2.822,-1.284 -2.501,-1.439 -2.279,-1.717 -2.2,-2.064 -2.2,-2.064 -2.279,-2.411 -2.501,-2.69 -2.822,-2.844 -3.178,-2.844 -3.499,-2.69 -3.721,-2.411 -3.8,-2.064
  silkscreen extent -7.25,-4.76 7.25,9.69
SW-TH_MSK12C02 [mm]
  rect 0.6x1.524 smd: 1(-2.25,1.7) 2(0.75,1.7) 3(2.25,1.7)
  rect 1.2x0.7 smd: 4(-3.6,-1.7) 4(-3.6,0.6) 4(3.6,-1.7) 4(3.6,0.6)
  Multi-Layer board cut-out: -1.5,-1 -1.695,-0.956 -1.852,-0.831 -1.939,-0.65 -1.939,-0.45 -1.852,-0.27 -1.695,-0.145 -1.5,-0.1 -1.5,-0.1 -1.305,-0.145 -1.148,-0.269 -1.061,-0.45 -1.061,-0.65 -1.148,-0.831 -1.305,-0.956 -1.5,-1
  Multi-Layer board cut-out: 1.5,-1 1.305,-0.956 1.148,-0.831 1.061,-0.65 1.061,-0.45 1.148,-0.27 1.305,-0.145 1.5,-0.1 1.5,-0.1 1.695,-0.145 1.852,-0.269 1.939,-0.45 1.939,-0.65 1.852,-0.831 1.695,-0.956 1.5,-1
  Multi-Layer keep-out region: -1.5,-1 -1.695,-0.956 -1.852,-0.831 -1.939,-0.65 -1.939,-0.45 -1.852,-0.27 -1.695,-0.145 -1.5,-0.1 -1.5,-0.1 -1.305,-0.145 -1.148,-0.269 -1.061,-0.45 -1.061,-0.65 -1.148,-0.831 -1.305,-0.956 -1.5,-1
  Multi-Layer keep-out region: 1.5,-1 1.305,-0.956 1.148,-0.831 1.061,-0.65 1.061,-0.45 1.148,-0.27 1.305,-0.145 1.5,-0.1 1.5,-0.1 1.695,-0.145 1.852,-0.269 1.939,-0.45 1.939,-0.65 1.852,-0.831 1.695,-0.956 1.5,-1
  silkscreen extent -3.4,-3.53 3.4,0.95
TF-SMD_TF-015 [mm]
  rect 0.7x2 smd: 1(2.303,5.095) 2(1.21,5.093) 3(0.113,5.095) 4(-0.986,5.095) 5(-2.085,5.095) 6(-3.183,5.095) 7(-4.28,5.095) 8(-5.378,5.095) 9(-6.482,5.095)
  rect 1.2x1.397 smd: 10(-7.765,4.557)
  rect 1.27x2.286 smd: 11(-7.729,-5.095) 12(7.765,-5.095)
  rect 1.778x1.397 smd: 13(7.003,4.557)
  Multi-Layer board cut-out: -4.397,-5.507 -4.465,-5.756 -4.648,-5.938 -4.897,-6.004 -5.147,-5.938 -5.33,-5.756 -5.397,-5.507 -5.397,-5.507 -5.33,-5.258 -5.147,-5.076 -4.897,-5.009 -4.648,-5.076 -4.465,-5.258 -4.397,-5.507
  Multi-Layer board cut-out: 3.603,-5.504 3.535,-5.753 3.352,-5.935 3.103,-6.002 2.853,-5.935 2.67,-5.753 2.603,-5.504 2.603,-5.504 2.67,-5.255 2.853,-5.073 3.103,-5.007 3.352,-5.073 3.535,-5.255 3.603,-5.504
  Multi-Layer keep-out region: -4.397,-5.507 -4.465,-5.756 -4.648,-5.938 -4.897,-6.004 -5.147,-5.938 -5.33,-5.756 -5.397,-5.507 -5.397,-5.507 -5.33,-5.258 -5.147,-5.076 -4.897,-5.009 -4.648,-5.076 -4.465,-5.258 -4.397,-5.507
  Multi-Layer keep-out region: 3.603,-5.504 3.535,-5.753 3.352,-5.935 3.103,-6.002 2.853,-5.935 2.67,-5.753 2.603,-5.504 2.603,-5.504 2.67,-5.255 2.853,-5.073 3.103,-5.007 3.352,-5.073 3.535,-5.255 3.603,-5.504
  silkscreen extent -7.3,-9.55 7.5,4.19
uart2.54 [mil]
  rect 60x196.85 smd: 1(0,0) 2(100,0) 3(200,0) 4(300,0)
USB-C-SMD_TYPE-C-6PIN-2MD-073#1 [mm]
  rect 0.6x1.1 smd: 1(-3.2,2.375) 2(-2.4,2.375) 11(2.4,2.375) 12(3.2,2.375)
  rect 0.3x1.1 smd: 3(-1.75,2.375) 4(-1.25,2.375) 5(-0.75,2.375) 6(-0.25,2.375) 7(0.25,2.375) 8(0.75,2.375) 9(1.25,2.375) 10(1.75,2.375)
  oval 1.2x1.8 hole 0.6 slot 1.2 at 90 deg: 13(-4.325,-2.375) 14(4.325,-2.375)
  oval 1.2x2 hole 0.6 slot 1.5 at 90 deg: 13(-4.325,1.825) 14(4.325,1.825)
  Multi-Layer board cut-out: -3.24,1.305 -3.191,1.477 -3.063,1.603 -2.89,1.648 -2.717,1.603 -2.589,1.477 -2.54,1.305 -2.54,1.305 -2.589,1.133 -2.717,1.007 -2.89,0.962 -3.063,1.007 -3.191,1.133 -3.24,1.305
  Multi-Layer board cut-out: 2.54,1.305 2.589,1.477 2.717,1.603 2.89,1.648 3.063,1.603 3.191,1.477 3.24,1.305 3.24,1.305 3.191,1.133 3.063,1.007 2.89,0.962 2.717,1.007 2.589,1.133 2.54,1.305
  Multi-Layer keep-out region: -3.24,1.305 -3.191,1.477 -3.063,1.603 -2.89,1.648 -2.717,1.603 -2.589,1.477 -2.54,1.305 -2.54,1.305 -2.589,1.133 -2.717,1.007 -2.89,0.962 -3.063,1.007 -3.191,1.133 -3.24,1.305
  Multi-Layer keep-out region: 2.54,1.305 2.589,1.477 2.717,1.603 2.89,1.648 3.063,1.603 3.191,1.477 3.24,1.305 3.24,1.305 3.191,1.133 3.063,1.007 2.89,0.962 2.717,1.007 2.589,1.133 2.54,1.305
  silkscreen extent -4.5,-4.97 4.57,0.6
USB-C-SMD_TYPE-C-6PIN-2MD-073#2 [mm]
  rect 0.6x1.1 smd: 1(-3.2,2.375) 2(-2.4,2.375) 11(2.4,2.375) 12(3.2,2.375)
  rect 0.3x1.1 smd: 3(-1.75,2.375) 4(-1.25,2.375) 5(-0.75,2.375) 6(-0.25,2.375) 7(0.25,2.375) 8(0.75,2.375) 9(1.25,2.375) 10(1.75,2.375)
  oval 1.2x1.8 hole 0.6 slot 1.2 at 90 deg: 13(-4.325,-2.375) 14(4.325,-2.375)
  oval 1.2x2 hole 0.6 slot 1.5 at 90 deg: 13(-4.325,1.825) 14(4.325,1.825)
  Multi-Layer board cut-out: -2.89,1.655 -2.718,1.606 -2.592,1.478 -2.546,1.305 -2.592,1.132 -2.718,1.004 -2.89,0.955 -2.89,0.955 -3.062,1.004 -3.187,1.132 -3.233,1.305 -3.187,1.478 -3.062,1.606 -2.89,1.655
  Multi-Layer board cut-out: 2.89,1.655 3.062,1.606 3.188,1.478 3.234,1.305 3.188,1.132 3.062,1.004 2.89,0.955 2.89,0.955 2.718,1.004 2.593,1.132 2.547,1.305 2.593,1.478 2.718,1.606 2.89,1.655
  Multi-Layer keep-out region: -2.89,1.655 -2.718,1.606 -2.592,1.478 -2.546,1.305 -2.592,1.132 -2.718,1.004 -2.89,0.955 -2.89,0.955 -3.062,1.004 -3.187,1.132 -3.233,1.305 -3.187,1.478 -3.062,1.606 -2.89,1.655
  Multi-Layer keep-out region: 2.89,1.655 3.062,1.606 3.188,1.478 3.234,1.305 3.188,1.132 3.062,1.004 2.89,0.955 2.89,0.955 2.718,1.004 2.593,1.132 2.547,1.305 2.593,1.478 2.718,1.606 2.89,1.655
  silkscreen extent -4.5,-4.97 4.57,0.6
WSON-8_L8.0-W6.0-P1.27-TL-EP [mm]
  rect 1x0.7 smd: 1(-4,1.905) 2(-4,0.635) 3(-4,-0.635) 4(-4,-1.905) 5(4,-1.905) 6(4,-0.635) 7(4,0.635) 8(4,1.905)
  rect 4.65x5.2 smd: 9(0,0)
  silkscreen extent -4.32,-3.18 4.32,3.18

## Via types
v1: diameter 19.7, hole 11.8, Top Layer to Bottom Layer, 200 vias
v2: diameter 15.67, hole 11.81, Top Layer to Bottom Layer, 82 vias
v3: diameter 27.56, hole 15.75, Top Layer to Bottom Layer, 77 vias
v4: diameter 15.7, hole 11.8, Top Layer to Bottom Layer, 1 vias

## Nets (pads, with @x,y where several pads share a name; then routed paths per layer and width w, separated by ;. In a path a pad name is that pad's centre, name@x,y a point inside that pad or via, vN(x,y) a via of type N, cw(c..) or ccw(c..) an arc to the next point about the centre after c; other vN are vias at no path point)
1V2: C36.1 C37.1 L1.2 R1.2 U1.22 U1.35 U1.71 | length 2460.5
  Inner1 w10: v1(3910,4782) 3938,4810 3938,5002 3968,5032 v1(4220,5032) 4190,5002 4190,4884 4214,4860 v1(4298,4860) 4384,4774 4780,4774 5126,4428 5126,4274 5314,4086 v3(5358,4086) 5358,4053.51 5361.8,4049.71
  Bottom Layer w10: U1.71@3874,4782 v1(3910,4782) ; v1(4220,5032) 4236,5048 U1.22@4236,5078 ; U1.35@4274,4862 4294.75,4862 4296.75,4860 v1(4298,4860)
  Bottom Layer w15: v3(5320,4088) 5320,4122
2V5: C11.2 C32.1 C33.1 L3.2 R5.2 R23.1 U1.30 U1.31 U1.32 U1.34 U1.36 | length 2299.8
  Inner1 w15: v1(4226,4888) v1(4226,4916) 4257,4916 4272,4931 4272,4980 v1(4386,5094) 4428,5052 4428,4911.82 4511.82,4828 4958,4828 5336,4450 v1(5492,4450) v1(5516,4450) v1(5542,4450)
  Bottom Layer w7: v1(4226,4888) 4238,4888 4240,4886 ; v1(4226,4916) 4240,4916 4248,4908 ; U1.34@4260,4878 4248,4878 4240,4870 ; U1.32@4262,4908 4248,4908 ; U1.36@4268,4846 4248.75,4846 4240,4854.75 4240,4870 ; U1.32@4268,4908 U1.30@4268,4940 ; 4240,4870 4240,4886 ; 4240,4886 4240,4900 4248,4908
  Bottom Layer w15: v1(4386,5094) 4402,5078 R23.1@4402,5058 ; C11.2@4402,4992 R23.1@4402,5058 ; R23.1@4404,5060 R23.1@4402,5058 ; v1(5542,4450) 5624,4450 5666,4408 L3.2@5666,4354
  other v1: 4398.9,5021.08
3V3: C2.2 C20.1 C21.2 C34.1 C35.1 C38.2 C39.2 C40.1 C47.2 C56.1 C61.1 C62.1 L2.2 R3.2 R7.2 R8.2 R9.2 R10.2 R11.2 R12.2 R22.2 R52.2 R53.2 R54.2 R55.1 R56.2 R60.1 U1.4 U1.5 U1.20 U1.50 U1.67 U1.73 U14.4 U15.3 U15.7 U15.8 U25.3 U27.1 U27.3 U27.4 U27.6 U28.4 U31.10 U33.10 U35.10 | length 3654.4
  Top Layer w5: v1(4146,4562) 4174,4590 v1(4174,4654)
  Bottom Layer w5: C20.1@3914,5154 v1(3948,5154) ; U15.7@3916,4218 v1(3916,4264) ; v1@3952,5154 3952,5084 U1.4@3954,5082 ; U15.8@3964,4218 v1(3964,4264) ; v1(4146,4562) 4146,4548 4150,4544 C39.2@4176,4544 ; U1.50@4158,4688 4158,4662 4166,4654 v1(4174,4654) ; v1(5536,4758) 5546,4768 R53.2@5722,4768 ; R54.2@5724,4648 5724,4720 R52.2@5728,4724 ; R53.2@5728,4772 R52.2@5728,4724 ; R52.2@5732,4714 5728,4718 R52.2@5728,4724
  Bottom Layer w7: v1(3948,5154) 3952,5154 C21.2@3974,5154 ; U1.5@3968,5082 3968,5148 C21.2@3970,5150 ; U1.20@4206,5080 4206,5108 4210,5112 4256,5112 v1(4266,5102)
  Bottom Layer w8: v1(3846,4814) U1.73@3868,4814 ; U1.67@3876,4720 3902,4720 v1(3914,4732) ; U27.3@4238,4296 4238,4314 v1(4246,4322) ; U27.4@4258,4292 4258,4310 v1(4246,4322) ; U27.6@4298,4286 4298,4314 4290,4322 v1(4246,4322) ; R8.2@4554,4408 4558,4412 4642,4412 v1(4682,4372) ; C56.1@4776,4100 v1(4744,4132) 4736,4140 4736,4216 4756,4236 v1(4760,4236) 4772,4248 U31.10@4828,4248
  Bottom Layer w8.3: U33.10@3520,4136 v1(3520,4160) C61.1@3520,4196
  Bottom Layer w10: U35.10@3646,4290 v1(3686,4290) 3720,4290 C62.1@3722,4288 ; v1(3822,3798) 3842,3798 3864,3820 U15.3@3864,3902 ; U15.3@3862,3910 3862,3940 v1(3864,3942) ; C40.1@3870,3838 3872,3840 R22.2@3924,3840 ; C47.2@4146,4328 4154,4336 v1(4178,4336) 4186,4336 4198,4324 4198,4292 U27.1@4200,4290 ; U27.1@4200,4282 4200,4252 4212,4240 4236,4240 4238,4242 4238,4270 U27.3@4240,4272
  Bottom Layer w15: R60.1@3312,4462 3314,4464 3368,4464 3368,4612 3482,4726 C2.2@3518,4726 ; C2.2@3518.66,4728.07 3544.65,4702.07 U25.3@3627.22,4702.07 ; U25.3@3624,4708 3714,4618 3736,4618 3758,4640 v1(3780,4640) R12.2@3780,4684 ; C39.2@4180,4544 v1(4222,4544) C38.2@4244,4544 ; U14.4@4748,4556 4748,4422 4758,4412 R10.2@4914,4412 ; v1(4786,4374) R11.2@4786,4400 ; v1(4848,4374) R9.2@4848,4408 ; v1(4896,4366) 4914,4384 R10.2@4914,4412 ; R10.2@4916,4410 R10.2@4914,4412 ; v1(5052,4098) 5100,4098 ; 5098,4230 v1(5126,4230) ; v1(5106,4526) 5126,4526 5136,4536 5136,4562 ; 5130,3776 v1(5130,3816) ; R56.2@5140,4834 v1(5140,4878) ; 5180,3956 5208,3956 v1(5222,3942) ; v3(5438,4408) 5438,4370 L2.2@5440,4368 ; v1(5802,4504) U28.4@5802,4534
  other v1: 4294,4322 3716,4618 3750,4630
  other v3: 5328,4302 5390,4372
5V: C70.2 R57.1 SW1.1 U23.7 U23.8 U23.9 U23.10 U23.16 U23.18 U23.19 U29.6 U32.11 U37.2 | length 3205.7
  Top Layer w10: v1(5484,4128) 5507.2,4128 v1(5531.85,4152.65)
  Inner1 w15: v1(4236,3548) 4294,3548 v1(4300,3554) 4748,3554 v1(4864,3670) 4888,3646 v1(4888,3642) 5148,3902 5320,3902 5456,4038 v1(5552,4038) v1(5574,4038)
  Inner2 w15: v1(5498,4294) v4(5514,4294) 5532.3,4275.7 5532.3,4153.1 v1(5531.85,4152.65)
  Bottom Layer w7: U23.7@5466.3,4271.71 U23.8@5482.29,4271.71
  Bottom Layer w10: v1(4236,3548) 4236,3520 4238,3522 U37.2@4290,3522 ; U37.2@4300,3528 v1(4300,3554) ; U23.19@5466,4152 5482,4152 5482,4130 v1(5484,4128) ; U23.8@5482,4272 5482,4288 5488,4294 v1(5498,4294) ; U23.9@5498,4272 5514,4272 v4(5514,4294)
  Bottom Layer w12: U23.16@5514.3,4153.71 5530.79,4153.71 v1(5531.85,4152.65) 5554,4130.51 5554,4038 v1(5574,4038) 5718,4038 5778,4098 SW1.1@5832,4098
  Bottom Layer w15: v1(4864,3670) U32.11@4864,3738 ; v1(4888,3642) C70.2@4936,3642 ; U29.6@5646.36,4644.84 5646.36,4497.64 5726,4418 5726,4218 5826,4118 SW1.1@5826,4102
$1N5310: C9.1 U1.52 U13.3 | length 329.8
  Top Layer w5: v1(3978,4576) 3978,4580 4056,4658 v1(4130,4658)
  Bottom Layer w5: C9.1@3888,4524 3946,4524 U13.3@3954,4532 ; U13.3@3972,4538 3972,4570 v1(3978,4576) ; U1.52@4126,4688 4126,4662 v1(4130,4658)
$1N5315: C10.2 U1.51 U13.1 | length 394.2
  Top Layer w5: v1(4100,4562) 4148.35,4610.35 4148.35,4721.65 v1(4142,4728)
  Bottom Layer w5: U13.1@4054,4474 4092,4512 4092,4552 4100,4560 v1(4100,4562) ; U13.1@4058,4468 4108,4468 C10.2@4114,4474 ; U1.51@4142,4688 v1(4142,4728)
$1N7943: C11.1 C12.2 R23.2 R24.1 U1.33 | length 278.6
  Bottom Layer w7: U1.33@4270,4892 4290,4892 4324,4926 C12.2@4342,4926
  Bottom Layer w15: R24.1@4338,4866 4344,4872 R23.2@4344,5056
$1N8153: C15.1 U1.81 | length 123.9
  Bottom Layer w5: C15.1@3812,4864 3828,4864 3836,4872 3836,4924 3852,4940 U1.81@3874,4940
$1N8277: C13.1 C14.1 R25.2 U1.83 | length 319.8
  Bottom Layer w5: C13.1@3740,4984 3836,4984 3848,4972 U1.83@3870,4972
  Bottom Layer w10: C13.1@3738,4982 3718,4982 3688,4952 3688,4896 3718,4866 R25.2@3742,4866
$1N8350: R27.1 U1.3 | length 165.1
  Bottom Layer w5: R27.1@3820,5158 3850,5158 3880,5128 3922,5128 3938,5112 U1.3@3938,5084
$1N8354: C22.1 R27.2 U1.2 | length 200.3
  Bottom Layer w5: C22.1@3752,5098 3816,5098 R27.2@3818,5096 ; R27.2@3820,5098 3834,5112 3918,5112 3922,5108 U1.2@3922,5084
$1N10396: L3.1 U23.11
$1N10401: R5.1 R6.2 U23.14 | length 157.3
  Bottom Layer w5: U23.14@5546.3,4195.71 5564.3,4195.71 5572.3,4187.71 5572.3,4167.71 5596.3,4143.71 5608.3,4143.71 R6.2@5608.3,4081.71
$1N10440: R3.1 R4.2 U23.3 | length 237
  Bottom Layer w5: R3.1@5360.3,4243.71 5392.3,4211.71 U23.3@5424.3,4211.71
  Bottom Layer w7: R4.2@5232.3,4243.71 5232.3,4227.71 5242.3,4217.71 5332.3,4217.71 R3.1@5360.3,4245.71
$1N10454: R1.1 R2.2 U23.2 | length 221.5
  Bottom Layer w5: R2.2@5232.3,4119.71 5260.3,4147.71 5328.3,4147.71 5362.3,4181.71 5388.3,4181.71 5402.3,4195.71 U23.2@5422.3,4195.71
$1N10463: L1.1 U23.20
$1N10472: L2.1 U23.6
$1N22126: L4.1 U26.5
$1N22327: R31.1 U26.8 | length 60
  Bottom Layer w10: R31.1@5409.8,3762.81 U26.8@5469.8,3762.81
$1N22651: LED1.2 R33.2 | length 2325.7
  Top Layer w5: LED1.2@3470,3776 3470,3754 3488,3736 3502,3736 3554,3684 3684,3684 3744,3744 4784,3744 4789,3739 5441,3739 5458,3756 5458,3830 v1(5448,3840)
  Bottom Layer w5: v1(5448,3840) 5438.35,3849.65 5438.35,3940.35 5464,3966 R33.2@5488,3966
$1N24468: R33.1 R34.2 U26.2 | length 130
  Bottom Layer w10: U26.2@5491.8,3842.81 5491.8,3906.81 R34.2@5557.8,3906.81